# Altium PCB PCB2.PcbDoc (part 2 of 2)
Units mm, origin at the board's own origin, x right, y up, seen from the top; angles counter-clockwise.
Board outline 46.9 x 46.9 mm, 4 copper layers (Top Layer, Internal Plane 1, Signal Layer 2, Bottom Layer), stack 0.778 mm thick; 115 components, 66 nets, 371 pads, 999 vias.
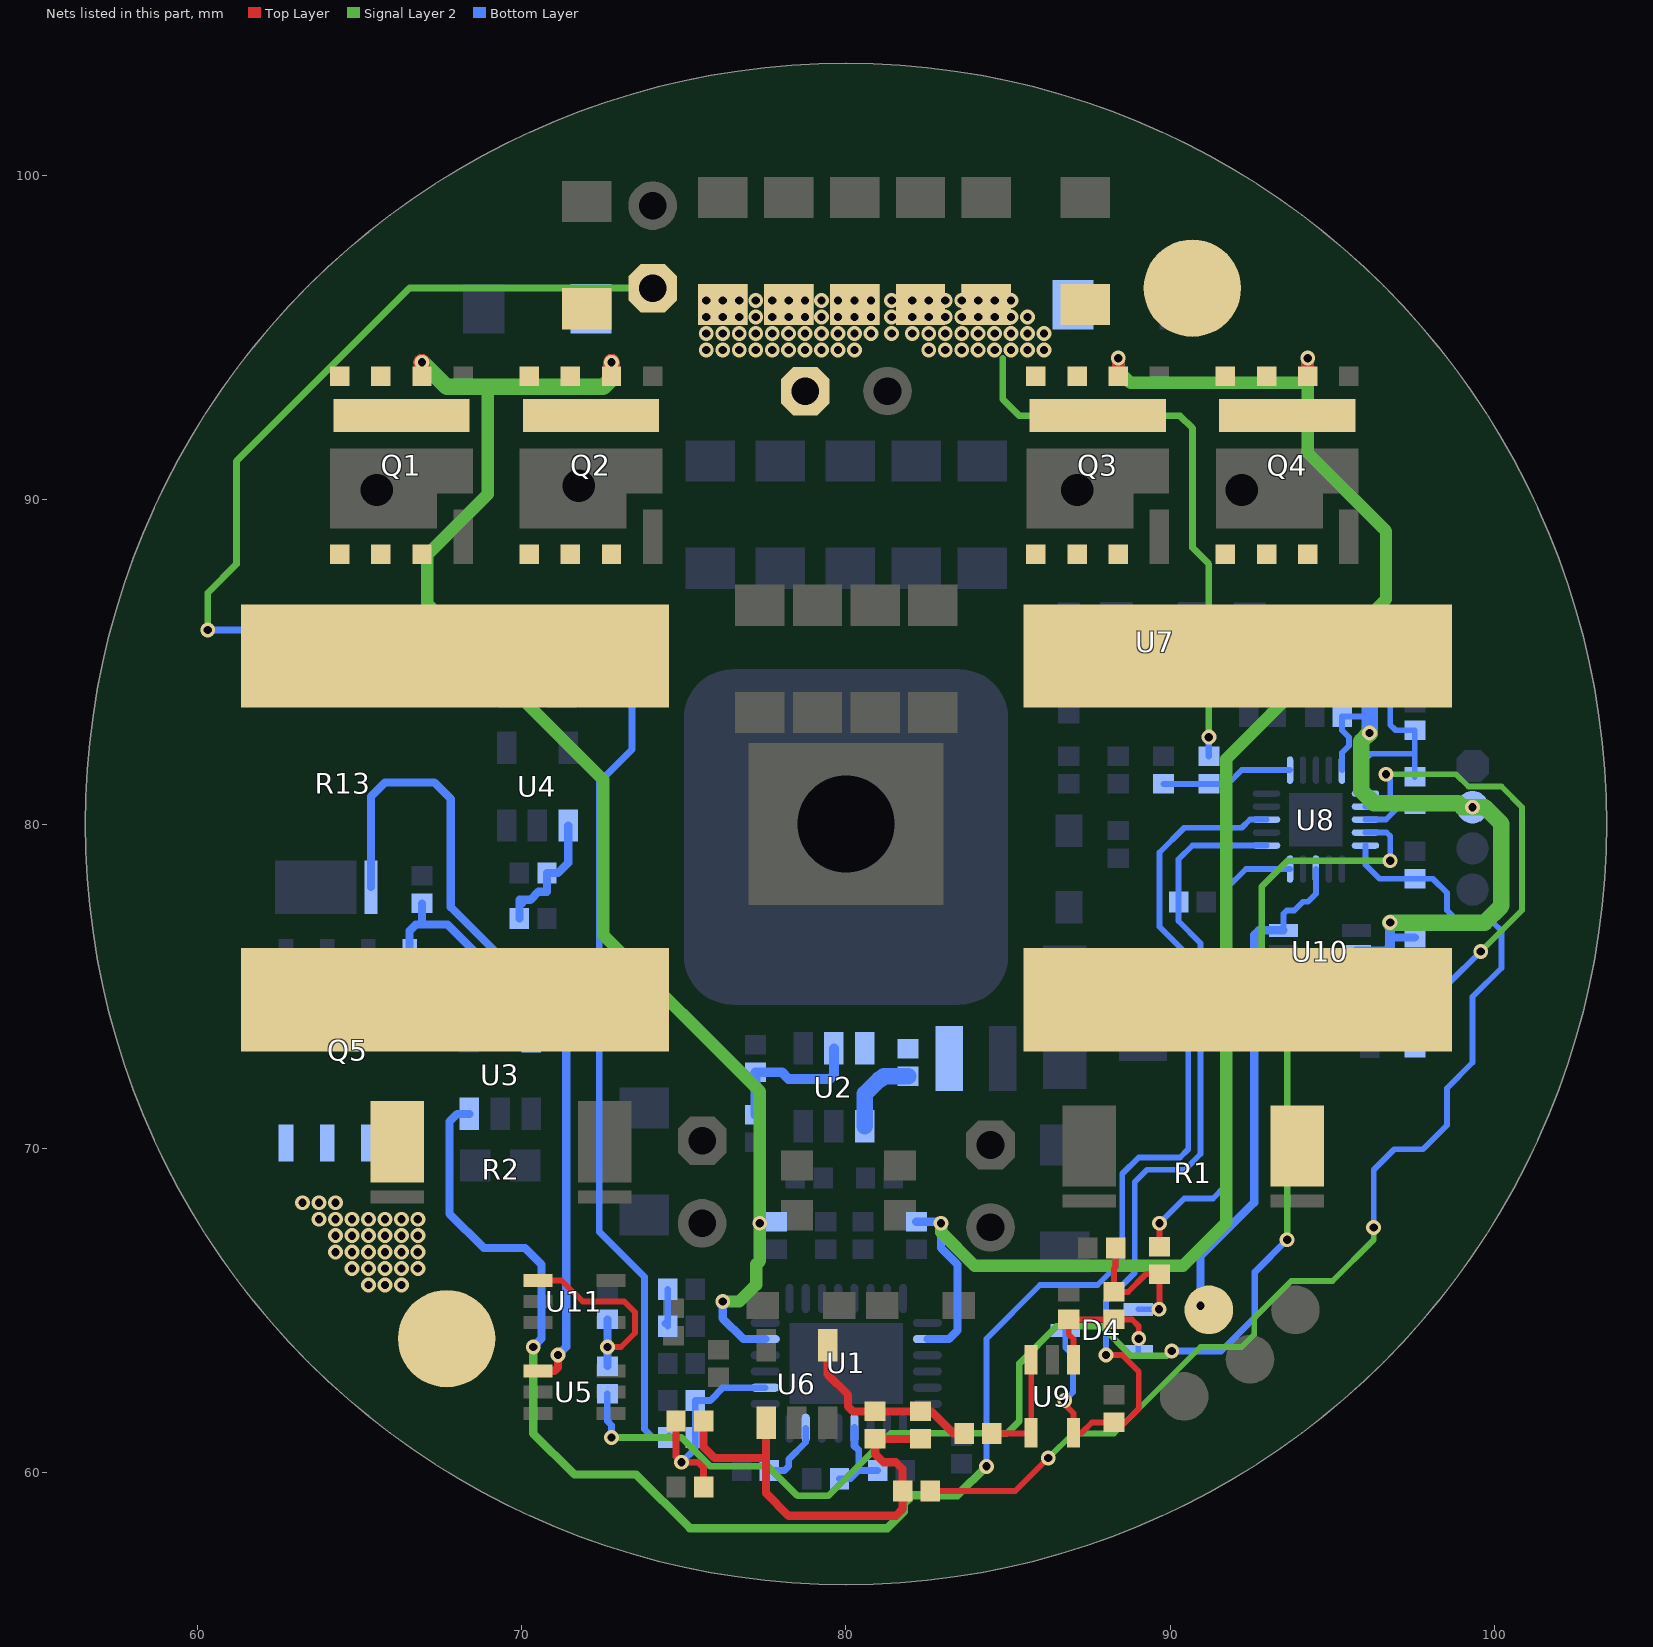
[diagram p4: the nets of this part, all layers, seen from the top]

## Via types
v1: diameter 0.457, hole 0.254, Top Layer to Bottom Layer, tented both sides, 999 vias

## Nets (pads, with @x,y where several pads share a name; then routed paths per layer and width w, separated by ;. In a path a pad name is that pad's centre, name@x,y a point inside that pad or via, vN(x,y) a via of type N, cw(c..) or ccw(c..) an arc to the next point about the centre after c; other vN are vias at no path point) (continued)
LARGEIS_P: R13.3 U5.4 | length 25.4
  Top Layer w0.254: U5.4@70.503,63.134 71.008,63.134 71.12,63.246 v1(71.12,63.627)
  Bottom Layer w0.254: R13.3@65.354,78.054 65.354,80.848 65.786,81.28 67.31,81.28 67.818,80.772 67.818,77.434 71.374,73.878 71.374,63.881 v1(71.12,63.627)
LARGESEL: U3.3 U8.18 | length 55.8
  Signal Layer 2 w0.254: v1(70.358,63.881) 70.358,61.214 71.628,59.944 73.533,59.944 75.184,58.293 81.28,58.293 81.788,58.801 81.788,59.055 82.042,59.309 83.439,59.309 v1(84.328,60.198)
  Bottom Layer w0.178: v1(84.328,60.198) 84.328,64.135 85.979,65.786 87.757,65.786 88.519,66.548 88.519,69.215 89.027,69.723 90.297,69.723 90.551,69.977 90.551,75.946 89.662,76.835 89.662,79.121 90.424,79.883 92.202,79.883 92.456,80.137 U8.18@92.963,80.137
  Bottom Layer w0.254: U3.3@68.392,71.063 68.015,71.063 67.78,70.828 67.78,67.983 68.834,66.929 70.104,66.929 70.612,66.421 70.612,64.135 v1(70.358,63.881)
LED-: pad.6@67.691,64.135 Q5.5 Q5.6 Q5.7 Q5.8
  other v1: 65.278,65.786 65.786,65.786 66.294,65.786 64.77,66.294 65.278,66.294 65.786,66.294 66.294,66.294 66.802,66.294 64.262,66.802 64.77,66.802 65.278,66.802 65.786,66.802 66.294,66.802 66.802,66.802 64.262,67.31 64.77,67.31 65.278,67.31 65.786,67.31 66.294,67.31 66.802,67.31 63.754,67.818 64.262,67.818 64.77,67.818 65.278,67.818 65.786,67.818 66.294,67.818 66.802,67.818 63.246,68.326 63.754,68.326 64.262,68.326
LX1: L1.2 Q3.5 Q3.6 Q3.7 Q4.5 Q4.6 Q4.7
LX2: L2.2 Q1.5 Q1.6 Q1.7 Q2.5 Q2.6 Q2.7
MCU5V: C39.2 C41.2 pad.1 R27.2 U7.5 U8.5 U10.5 | length 25.2
  Signal Layer 2 w0.508: v1(96.139,82.804) 95.885,82.55 95.885,81.026 96.266,80.645 98.87,80.645 98.996,80.518 v1(99.314,80.518) 99.695,80.518 100.203,80.01 100.203,77.476 99.689,76.962 v1(96.774,76.962)
  Bottom Layer w0.178: U8.5@95.288,81.662 95.288,82.199 95.504,82.415 95.504,82.677 95.294,82.887 C41.2@95.294,83.312 96.139,83.312
  Bottom Layer w0.254: 96.774,76.581 96.857,76.498 R27.2@97.536,76.498
  Bottom Layer w0.305: U10.5@95.74,76.073 96.647,76.073 96.774,76.2 96.774,76.581 v1(96.774,76.962)
  Bottom Layer w0.508: U7.5@90.735,84.648 91.379,84.648 91.559,84.828 C39.2@92.456,84.828 95.379,84.828 96.139,84.068 v1(96.139,82.804)
MODE: R10.1 R11.2 U1.4 | length 2.6
  Bottom Layer w0.208: R10.1@79.8,59.817 80.137,59.817 80.391,60.071 ; 80.26,60.837 80.391,60.706 80.391,60.071 ; R11.2@80.982,60.071 80.391,60.071
  Bottom Layer w0.254: 80.26,60.837 U1.4@80.26,61.373
MOSG: Q5.4 R12.1 U3.5 | length 7.2
  Bottom Layer w0.254: Q5.4@66.548,75.885 66.548,76.708 66.739,76.899 66.929,76.899 ; R12.1@66.929,77.553 66.929,76.899 ; U3.5@70.292,73.463 70.292,74.318 67.712,76.899 66.929,76.899
NetC5_1: C5.1 L3.2 U2.6
NetC5_2: C5.2 U2.1 | length 2.6
  Bottom Layer w0.508: U2.1@80.579,70.682 80.579,71.681 81.026,72.128 81.067,72.128 81.158,72.219 C5.2@81.915,72.219
NetC6_2: C6.2 R3.1 U2.5 | length 4.7
  Bottom Layer w0.305: C6.2@77.216,71.037 R3.1@77.216,72.346 78.022,72.346 78.232,72.136 79.502,72.136 79.629,72.263 U2.5@79.629,73.082
NetC31_1: C31.1 R7.2 | length 1.3
  Bottom Layer w0.208: R7.2@74.422,64.599 R7.2@74.505,64.516 C31.1@74.505,65.659
NetC35_2: C35.2 FB1.2 U4.1 | length 4.1
  Bottom Layer w0.254: FB1.2@69.933,77.089 69.933,77.663 ; 70.015,77.552 70.015,77.611 69.963,77.663 70.27,77.663 70.519,77.912 70.783,77.912 C35.2@70.783,78.486 71.12,78.486 71.435,78.801 U4.1@71.435,79.953
NetC37_1: C37.1 R15.2 R16.1 U6.4 | length 6
  Top Layer w0.254: U6.4@79.436,63.811 79.436,63.034 80.063,62.407 80.063,62.05 80.22,61.893 R16.1@80.899,61.893 C37.1@82.296,61.893 82.633,61.893 83.312,61.214 R15.2@83.649,61.214
NetC40_2: C40.2 FB2.2 U7.1 | length 3.8
  Bottom Layer w0.254: FB2.2@86.868,84.245 C40.2@86.868,85.681 87.293,85.681 87.503,85.471 87.503,84.709 87.564,84.648 U7.1@88.335,84.648
NetC44_2: C44.2 D4.1 R24.2 R25.1 | length 4.7
  Top Layer w0.178: C44.2@88.309,66.929 88.309,66.338 88.265,66.294 R25.1@88.265,65.576 88.69,65.576 89.237,66.123 R24.2@89.662,66.123 v1@89.662,65.054
  Bottom Layer w0.178: D4.1@89.009,65.039 v1(89.647,65.039)
NetC45_2: C45.2 D4.2 R25.2 U9.1 | length 4.3
  Top Layer w0.178: U9.1@87.01,63.482 87.01,64.12 86.868,64.262 C45.2@86.868,64.726 R25.2@88.265,64.726 88.817,64.726 89.027,64.516 v1(89.027,64.135)
  Bottom Layer w0.178: D4.2@89.009,63.739 89.009,64.117 v1(89.027,64.135)
NetC56_2: C56.2 R32.1 U11.1 | length 6.5
  Top Layer w0.178: U11.1@70.503,65.928 71.232,65.928 71.882,65.278 73.162,65.278 73.492,64.948 73.492,64.308 73.065,63.881 v1(72.644,63.881)
  Bottom Layer w0.254: R32.1@72.644,63.29 C56.2@72.644,64.726
NetD5_A: D5.A R31.1 | length 2.4
  Bottom Layer w0.178: D5.A@96.139,74.21 96.732,74.21 96.774,74.168 96.774,73.279 96.945,73.108 R31.1@97.536,73.108
NetL1_1: L1.1 R1.1
NetL2_1: L2.1 R2.0
OPOUT: C37.2 R16.2 R17.1 R28.1 U6.1 | length 13.6
  Top Layer w0.254: R17.1@75.609,61.595 75.609,60.789 75.946,60.452 77.536,60.452 ; U6.1@77.536,61.411 77.536,60.452 ; C37.2@82.296,61.043 R16.2@80.899,61.043 80.899,60.579 81.153,60.325 81.534,60.325 81.744,60.115 R28.1@81.744,59.436 81.744,58.884 81.534,58.674 78.232,58.674 77.536,59.37 77.536,60.452
OPVCC: C43.2 D4.3 R26.2 U8.16 U9.5 | length 28.3
  Top Layer w0.178: v1(86.741,62.23) 86.741,62.103 87.01,61.834 U9.5@87.01,61.232 87.267,61.232 87.586,61.551 C43.2@88.265,61.551 88.602,61.551 89.027,61.976 89.027,63.119 88.519,63.627 88.265,63.627
  Bottom Layer w0.178: v1(86.741,62.23) 86.995,62.484 86.995,63.627 86.759,63.863 D4.3@86.759,64.389 ; v1(88.011,63.627) 88.011,65.278 88.9,66.167 88.9,68.961 89.281,69.342 90.45,69.342 90.932,69.824 90.932,76.327 90.253,77.006 R26.2@90.253,77.597 90.253,78.912 90.678,79.337 U8.16@92.963,79.337
OUTFB: R21.1 R23.2 U8.1 | length 4.1
  Bottom Layer w0.178: R23.2@89.789,81.236 91.777,81.236 92.203,81.662 U8.1@93.688,81.662
PHASE1: C10.2 Q3.2 Q4.2 U1.24 | length 52.5
  Top Layer w0.381: Q3.2@88.392,93.809 v1(88.392,94.361) ; Q4.2@94.234,93.809 v1(94.234,94.361)
  Signal Layer 2 w0.381: v1(82.931,67.691) 82.931,67.419 83.966,66.383 90.386,66.383 91.722,67.719 91.722,82.003 96.647,86.928 96.647,89.027 94.234,91.44 94.234,93.599 ; v1(88.392,94.361) 88.392,93.98 88.773,93.599 94.234,93.599 ; v1(94.234,94.361) 94.234,93.599
  Bottom Layer w0.254: C10.2@82.169,67.735 v1@82.887,67.735 ; U1.24@82.51,64.123 83.173,64.123 83.439,64.389 83.439,66.421 82.931,66.929 v1(82.931,67.691)
PHASE2: C9.2 Q1.2 Q2.2 U1.13 | length 43.7
  Top Layer w0.508: Q1.2@66.929,93.809 v1(66.929,94.234) ; Q2.2@72.771,93.809 v1(72.771,94.234)
  Signal Layer 2 w0.381: 68.961,93.472 68.961,90.17 67.096,88.305 67.096,86.781 72.517,81.36 72.517,76.581 77.343,71.755 v1(77.343,67.691) 77.343,66.535 77.232,66.423 77.232,65.802 76.708,65.278 v1(76.2,65.278)
  Signal Layer 2 w0.508: v1(66.929,94.234) 67.691,93.472 68.961,93.472 72.517,93.472 72.771,93.726 v1(72.771,94.234)
  Bottom Layer w0.254: v1(76.2,65.278) 76.2,64.763 76.84,64.123 U1.13@77.51,64.123
PRECHARGEEN: R32.2 U8.9 | length 45.6
  Signal Layer 2 w0.203: v1@72.898,61.087 74.93,61.087 75.819,60.198 77.597,60.198 78.508,59.287 79.451,59.287 81.378,61.214 84.963,61.214 85.344,61.595 85.344,63.373 86.487,64.516 87.884,64.516 88.795,63.605 89.894,63.605 v1(90.043,63.754) ; v1(93.599,67.183) 93.599,75.311 92.815,76.095 92.815,78.071 93.611,78.867 96.52,78.867
  Bottom Layer w0.178: U8.9@96.013,79.737 96.666,79.737 96.774,79.629 v1(96.774,78.867)
  Bottom Layer w0.203: R32.2@72.644,62.44 72.644,61.595 72.771,61.468 v1(72.771,61.087) ; v1(90.043,63.754) 91.567,63.754 92.605,64.792 92.605,66.189 v1(93.599,67.183)
PWM: R24.1 U8.15 | length 14.8
  Top Layer w0.178: R24.1@89.662,66.973 v1(89.662,67.691)
  Bottom Layer w0.178: v1(89.662,67.691) 90.424,68.453 91.313,68.453 91.694,68.834 91.694,77.978 92.329,78.613 93.218,78.613 ; 93.092,78.612 U8.15@93.688,78.612
RLED: pad.4@91.186,65.024 U8.13 U10.3 | length 15.6
  Bottom Layer w0.178: U10.3@93.49,76.723 93.49,77.234 93.59,77.334 93.819,77.334 94.092,77.606 94.243,77.606 94.488,77.851 U8.13@94.488,78.612
  Bottom Layer w0.254: v1(90.932,65.151) 90.932,66.675 92.583,68.326 92.583,76.581 92.725,76.723 U10.3@93.49,76.723
SS: C33.1 U1.7 | length 2
  Bottom Layer w0.208: C33.1@77.641,60.071 78.105,60.071 78.232,60.198 78.232,60.413 78.76,60.941 U1.7@78.76,61.373
SYSHB: R31.2 U8.7 | length 14.5
  Signal Layer 2 w0.178: v1(96.647,81.534) 98.806,81.534 99.187,81.153 100.203,81.153 100.838,80.518 100.838,77.343 v1(99.568,76.073)
  Bottom Layer w0.178: U8.7@96.013,80.537 96.488,80.537 96.774,80.823 v1@96.774,81.407 ; R31.2@97.536,73.958 98.469,73.958 98.552,74.041 98.552,75.057 v1(99.568,76.073)
TEMPSEN: C47.2 R29.1 R30.1 U8.6 | length 9.4
  Bottom Layer w0.178: R30.1@94.607,86.233 94.607,85.606 94.742,85.471 94.869,85.471 94.969,85.371 95.604,85.371 96.774,84.201 96.774,83.058 96.945,82.887 C47.2@97.536,82.887 97.536,82.169 ; U8.6@96.013,80.937 96.013,82.008 96.174,82.169 97.536,82.169 ; R29.1@97.536,81.451 97.536,82.169
TSEN: R29.2 U8.8 | length 1.7
  Bottom Layer w0.178: U8.8@96.013,80.137 96.647,80.137 97.111,80.601 R29.2@97.536,80.601
VFB: R6.1 R8.1 R14.2 R17.2 U1.10 | length 7.1
  Top Layer w0.208: R17.2@74.759,61.595 74.759,60.496 v1(74.93,60.325) 75.438,60.325 75.609,60.154 R14.2@75.609,59.563
  Bottom Layer w0.208: v1(74.93,60.325) 75.355,60.75 R6.1@75.355,61.087 R8.1@75.355,62.23 75.819,62.23 76.212,62.623 U1.10@77.51,62.623
VOP: C46.2 R28.2 U8.10 | length 34.8
  Top Layer w0.178: R28.2@82.594,59.436 85.217,59.436 v1(86.233,60.452)
  Signal Layer 2 w0.178: v1(86.233,60.452) 86.995,61.214 88.265,61.214 90.932,63.881 92.202,63.881 92.583,64.262 92.583,64.77 93.726,65.913 94.996,65.913 96.266,67.183 v1(96.266,67.564)
  Bottom Layer w0.178: U8.10@96.013,79.337 U8.10@96.013,79.337 96.012,78.746 96.443,78.315 C46.2@97.536,78.315 98.088,78.315 98.525,77.878 98.525,77.343 98.906,76.962 99.949,76.962 100.203,76.708 100.203,75.565 99.314,74.676 99.314,72.644 98.525,71.855 98.525,70.712 97.79,69.977 96.901,69.977 96.266,69.342 v1(96.266,67.564)
VOUT: C3.1 C4.1 C16.2 C17.2 C18.2 C19.2 C20.2 C21.2 C22.2 C23.2 C24.2 C50.2 C51.2 C52.2 C53.2 C54.2 pad.5 Q1.3 Q1.4 Q1.9 Q2.3 Q2.4 Q2.9 Q3.3 Q3.4 Q3.9 Q4.3 Q4.4 Q4.9 R6.2 R21.2 | length 77.5
  Signal Layer 2 w0.208: v1(60.325,85.979) 60.325,87.122 61.214,88.011 61.214,91.186 66.548,96.52 C4.1@74.041,96.52 ; 84.836,94.361 84.836,93.091 85.344,92.583 90.297,92.583 90.678,92.202 90.678,88.519 91.186,88.011 v1(91.186,82.677)
  Bottom Layer w0.208: v1(60.325,85.979) 72.517,85.979 73.406,85.09 73.406,82.296 72.39,81.28 72.39,67.437 73.787,66.04 73.787,61.341 74.041,61.087 R6.2@74.505,61.087 R6.2@74.549,61.131 ; R21.2@91.186,82.086 v1(91.186,82.677)
  other v1: 75.692,94.615 76.2,94.615 76.708,94.615 77.216,94.615 77.724,94.615 78.232,94.615 78.74,94.615 79.248,94.615 79.756,94.615 80.264,94.615 82.55,94.615 83.058,94.615 83.566,94.615 84.074,94.615 84.582,94.615 85.09,94.615 85.598,94.615 86.106,94.615 75.692,95.123 76.2,95.123 76.708,95.123 77.216,95.123 77.724,95.123 78.232,95.123 78.74,95.123 79.248,95.123 79.756,95.123 80.264,95.123 80.772,95.123 81.407,95.123 82.042,95.123 82.55,95.123 83.058,95.123 83.566,95.123 84.074,95.123 84.582,95.123 85.09,95.123 85.598,95.123 86.106,95.123 75.692,95.631 76.2,95.631 76.708,95.631 77.216,95.631 77.724,95.631 78.232,95.631 78.74,95.631 79.248,95.631 79.756,95.631 80.264,95.631 80.772,95.631 81.407,95.631 82.042,95.631 82.55,95.631 83.058,95.631 83.566,95.631 84.074,95.631 84.582,95.631 85.09,95.631 85.598,95.631 75.692,96.139 76.2,96.139 76.708,96.139 77.216,96.139 77.724,96.139 78.232,96.139 78.74,96.139 79.248,96.139 79.756,96.139 80.264,96.139 80.772,96.139 81.407,96.139 82.042,96.139 82.55,96.139 83.058,96.139 83.566,96.139 84.074,96.139 84.582,96.139 85.09,96.139
VREF: R15.1 U9.3 U9.4 | length 3.5
  Top Layer w0.178: R15.1@84.499,61.214 85.692,61.214 U9.4@85.71,61.232 U9.3@85.71,63.482
pads on no net: U1.2 U1.3 U1.12 U1.25 U4.2 U7.2 U8.17 U10.4

## Polygon pours and split planes (outlines as drawn)
GND on Bottom Layer "Component Side-No Net 1" (solid, remove dead copper, pour order 154): 65.754,77.053 65.833,76.974 68.961,76.974 68.961,76.581 71.12,74.422 70.993,74.295 70.993,72.263 66.929,72.263
GND on Bottom Layer "Component Side-No Net 1" (solid, remove dead copper, pour order 117): 82.76,60.821 84.824,60.821 85.09,61.087 85.852,61.849 85.852,67.183 85.09,67.183 84.836,66.929 81.915,66.929 81.915,64.516 83.058,63.373 83.058,62.23 82.53,62.23 81.881,61.581
GND on Bottom Layer "Component Side-No Net 1" (solid, remove dead copper, pour order 115): 68.382,82.677 68.551,82.846 70.935,82.846 70.935,85.529 70.612,85.852 70.231,85.471 67.818,85.471
GND on Bottom Layer "Component Side-No Net 1" (solid, remove dead copper, pour order 112): 57.702,86.106 65.128,86.106 65.754,85.48 65.687,85.413 65.687,82.677 58.547,82.677 58.42,82.55
GND on Bottom Layer "Component Side-No Net 1" (solid, remove dead copper, pour order 109): 86.141,87.797 86.056,87.712 86.056,85.977 91.384,85.977 91.712,85.649 92.398,84.963 99.187,84.963 99.187,87.884 99.822,88.519 97.028,91.313 85.344,91.313
GND on Bottom Layer "Component Side-No Net 1" (solid, remove dead copper, pour order 103): 86.487,53.213 85.979,53.721 85.979,89.408 109.855,89.408 109.982,89.281 110.236,89.027 110.236,53.086
GND on Bottom Layer "Component Side-No Net 1" (solid, remove dead copper, pour order 100): 52.959,82.423 57.404,86.868 84.582,86.868 101.854,86.868 103.886,88.9 100.838,91.948 100.838,103.505 62.484,103.505 59.309,106.68
GND on Bottom Layer "Component Side-No Net 1" (solid, remove dead copper, pour order 91): 56.261,78.74 58.42,80.899 73.787,80.899 73.787,68.707 74.803,67.691 75.819,66.675 75.819,66.548 74.295,66.548 73.787,66.04 73.477,65.73 73.477,64.226 73.477,56.459 73.406,56.388 73.152,56.134 55.499,56.134
GND on Bottom Layer "Component Side-No Net 1" (solid, remove dead copper, pour order 88): 70.358,66.294 70.485,66.167 77.414,66.167 98.171,66.167 98.933,65.405 100.076,64.262 100.076,54.483 63.119,54.483 59.436,50.8 56.388,53.848 56.388,69.342 69.723,69.342 69.977,69.088
GND on Bottom Layer "Component Side-No Net 1" (solid, remove dead copper, pour order 172): 92.202,82.296 93.218,81.28 93.218,68.58 101.6,68.58 101.727,68.453 104.648,71.374 104.648,83.058
GND on Bottom Layer "Component Side-No Net 1" (solid, remove dead copper, pour order 171): 54.864,89.281 56.134,88.011 75.692,88.011 75.692,76.2 77.343,74.549 77.775,74.117 77.775,71.987 77.775,71.044 77.343,70.612 77.089,70.866 53.213,70.866
12V on Bottom Layer "Component Side-No Net 1" (solid, remove dead copper, pour order 169): 72.644,71.247 72.644,72.39 72.771,72.517 75.311,72.517 76.454,72.517 76.454,71.247 76.454,69.469 76.15,69.165 76.1,69.215 72.644,69.215
12V on Bottom Layer "Component Side-No Net 1" (solid, remove dead copper, pour order 167): 82.042,70.993 82.042,68.961 87.791,68.961 88.045,69.214 88.011,69.248 88.011,71.247 88.011,71.501 87.884,71.628 87.757,71.501 83.312,71.501 82.042,71.501
12V on Bottom Layer "Component Side-No Net 1" (solid, remove dead copper, pour order 166): 72.39,72.517 72.39,68.961 76.2,68.961 76.454,69.215 76.454,72.517
GND on Bottom Layer "Component Side-No Net 1" (solid, remove dead copper, pour order 165): 83.693,68.58 82.804,68.58 82.804,65.659 83.185,65.278 83.439,65.024 84.582,65.024 88.011,65.024 88.265,65.278 88.138,65.405 88.138,68.961 83.693,68.961
6V0 on Bottom Layer "Component Side-No Net 1" (solid, remove dead copper, pour order 110): 84.213,73.827 84.328,73.711 84.328,71.424 85.675,71.424 87.757,69.342 87.985,69.57 90.678,69.57 90.678,73.787 90.551,73.914
GND on Bottom Layer "Component Side-No Net 1" (solid, remove dead copper, pour order 104): 85.323,68.884 85.725,68.482 85.725,66.167 91.186,66.167 92.075,67.056 92.075,73.279 92.075,76.173 91.23,77.018 91.159,77.089 85.979,77.089 85.217,77.089 85.09,76.962
GND on Bottom Layer "Component Side-No Net 1" (solid, remove dead copper, pour order 159): 55.372,86.106 62.56,86.106 63.246,85.42 63.246,82.423 59.817,82.423 57.15,79.756 56.515,80.391 54.737,80.391
GND on Bottom Layer "Component Side-No Net 1" (solid, remove dead copper, pour order 157): 73.533,66.548 76.454,66.548 76.454,66.421 76.835,66.04 76.708,65.913 76.708,65.024 76.835,65.024 77.216,64.643 77.851,64.643 77.978,64.643 78.359,65.024 77.978,65.405 77.978,68.961 73.533,68.961
GND on Bottom Layer "Component Side-No Net 1" (solid, remove dead copper, pour order 152): 83.566,68.707 83.566,67.021 83.739,66.848 83.912,66.675 85.344,66.675 85.344,68.834 85.471,68.961
GND on Bottom Layer "Component Side-No Net 1" (solid, remove dead copper, pour order 151): 86.141,87.249 95.25,87.249 95.504,86.995 95.504,85.725 95.631,85.598 95.758,85.471 98.425,85.471 102.489,85.471 103.632,86.614 103.378,86.868 103.378,90.424 86.141,90.297
GND on Bottom Layer "Component Side-No Net 1" (solid, remove dead copper, pour order 149): 83.439,68.453 87.63,68.453 88.011,68.072 88.011,66.548 88.011,66.421 87.884,66.294 86.36,66.294 83.82,66.294 83.439,66.675 83.439,67.056
GND on Bottom Layer "Component Side-No Net 1" (solid, remove dead copper, pour order 148): 85.598,74.676 88.138,74.676 88.265,74.549 88.392,74.422 89.535,74.422 89.916,74.422 90.043,74.549 90.043,75.565 90.043,75.946 89.916,76.073 89.535,76.454 89.027,76.454 88.011,76.454 87.63,76.835 87.63,78.105 85.709,78.105
LED- on Bottom Layer "Component Side-No Net 1" (solid, remove dead copper, pour order 146): 64.516,66.167 65.151,65.532 66.421,65.532 67.056,66.167 67.31,66.421 67.31,69.977 67.31,74.499 67.233,74.422 61.82,74.422 61.82,71.657 61.849,71.628 61.849,70.231 61.849,69.723 62.23,69.342 62.865,68.707 62.865,68.326 62.865,68.199 63.246,67.818 64.008,67.056 64.008,66.675
HPATH on Bottom Layer "Component Side-No Net 1" (solid, remove dead copper, pour order 141): 61.976,78.867 61.976,74.422 65.151,74.422 65.532,74.422 65.532,74.676 65.532,76.581 65.278,76.835 65.151,76.962 64.897,76.962 64.897,78.867
12V on Bottom Layer "Component Side-No Net 1" (solid, remove dead copper, pour order 132): 74.422,87.884 85.852,87.884 85.852,82.55 85.852,76.962 85.725,77.216 85.725,74.295 85.344,73.914 85.09,73.66 77.724,73.66 74.803,73.66 74.422,74.041
VOUT on Bottom Layer "Component Side-No Net 1" (solid, remove dead copper, pour order 129): 71.247,97.536 84.836,97.536 87.376,97.536 87.757,97.155 87.884,97.028 87.884,94.869 87.376,94.361 85.344,94.361 80.645,94.361 80.264,93.98 80.137,93.853 80.137,92.837 80.137,92.456 79.883,92.202 78.359,92.202 77.597,92.202 77.343,92.456 77.343,92.71 77.343,93.472 77.343,93.853 76.962,94.234 75.565,94.234 75.184,94.234 74.803,94.615 74.676,94.742 73.533,94.742 71.501,94.742 71.12,95.123 71.12,97.409
6V0 on Bottom Layer "Component Side-No Net 1" (solid, remove dead copper, pour order 105): 87.63,73.914 89.789,73.914 90.043,73.66 90.043,71.374 90.043,70.485 89.154,70.485 88.773,70.485 88.773,71.374 88.773,71.501 88.519,71.755 88.392,71.882 86.995,71.882 86.995,73.66 86.741,73.914
GND on Bottom Layer "Component Side-No Net 1" (solid, remove dead copper, pour order 102): 85.598,74.676 87.63,74.676 87.63,78.105 85.598,78.105
6V0 on Bottom Layer "Component Side-No Net 1" (solid, remove dead copper, pour order 98): 84.201,73.914 87.63,73.914 87.63,71.628 84.328,71.628 84.201,71.755
NetC5_1 on Bottom Layer "Component Side-No Net 1" (solid, remove dead copper, pour order 96): 80.137,73.787 83.693,73.787 83.693,71.755 82.804,71.755 82.296,71.755 82.296,72.517 81.661,72.517 80.137,72.517
12V on Bottom Layer "Component Side-No Net 1" (solid, remove dead copper, pour order 162): 74.422,87.556 74.422,88.519 85.852,88.519 85.852,86.487 85.598,86.233 84.709,85.344 84.709,83.395 80.347,83.395 80.01,83.058 79.375,83.693 74.422,83.693
GND on Bottom Layer "Component Side-No Net 1" (solid, remove dead copper, pour order 138): 70.358,84.709 70.358,81.788 70.104,81.534 69.977,81.407 69.977,80.391 69.977,79.248 70.231,78.994 70.358,78.867 70.358,78.486 70.358,78.105 70.231,77.978 70.104,78.105 69.215,78.105 69.088,78.105 68.834,78.359 68.707,78.486 68.707,84.709
GND on Bottom Layer "Component Side-No Net 1" (solid, remove dead copper, pour order 89): 67.945,74.041 68.072,73.914 68.072,71.755 68.961,71.755 69.045,71.671 69.045,70.566 69.599,70.566 69.723,70.69 69.723,71.755 70.993,71.755 70.993,72.644 70.612,72.644 69.215,72.644 68.961,72.644 68.834,72.771 68.834,74.041
GND on Bottom Layer "Component Side-No Net 1" (solid, remove dead copper, pour order 92): 67.945,70.104 68.821,70.104 69.133,70.417 69.215,70.498 69.215,71.882 69.673,71.882 69.792,71.763 69.723,71.694 69.723,68.834 67.945,68.834 67.818,68.961
GND on Bottom Layer "Component Side-No Net 1" (solid, remove dead copper, pour order 95): 74.041,66.548 73.993,66.596 68.834,66.596 68.834,70.866 72.644,74.676 81.661,74.676 84.99,74.676 85.548,74.118 84.963,73.533 84.963,66.421
GND on Bottom Layer "Component Side-No Net 1" (solid, remove dead copper, pour order 101): 76.237,60.327 76.96,60.327 76.962,60.325 77.089,60.198 77.089,59.182 76.2,59.182
GND on Signal Layer 2 "Component Side-No Net 1" (solid, remove dead copper, pour order 128): 79.502,90.678 79.756,90.932 79.756,94.615 83.566,94.615 83.439,94.488 83.439,89.027
GND on Signal Layer 2 "Component Side-No Net 1" (solid, remove dead copper, pour order 126): 82.437,68.834 85.852,68.834 86.233,69.215 86.233,66.548 82.621,66.548 82.24,66.167
GND on Signal Layer 2 "Component Side-No Net 1" (solid, remove dead copper, pour order 123): 73.372,68.757 76.103,68.757 76.307,68.961 77.089,68.179 77.089,66.675 74.041,66.675 73.902,66.814 73.635,67.081 73.018,67.081
GND on Signal Layer 2 "Component Side-No Net 1" (solid, remove dead copper, pour order 120): 68.326,102.616 69.469,101.473 76.454,101.473 76.454,98.171 77.089,97.536 69.342,97.536
GND on Signal Layer 2 "Component Side-No Net 1" (solid, remove dead copper, pour order 106): 54.102,107.188 104.267,107.188 104.394,107.061 112.395,99.06 112.395,53.721 57.531,53.721 56.388,54.864
12V on Signal Layer 2 "Component Side-No Net 1" (solid, remove dead copper, pour order 170): 72.771,71.14 72.771,72.517 75.057,72.517 75.438,72.517 76.454,71.501 76.307,71.354 76.307,68.961 72.771,68.961
12V on Signal Layer 2 "Component Side-No Net 1" (solid, remove dead copper, pour order 168): 72.771,71.501 75.946,71.501 76.327,71.12 76.454,70.993 76.454,69.215 76.454,69.088 76.327,68.961 76.073,68.961 72.898,68.961 72.771,68.961
12V on Signal Layer 2 "Component Side-No Net 1" (solid, remove dead copper, pour order 135): 76.547,75.531 76.454,75.623 76.454,85.598 83.566,85.598 83.566,75.438
LED- on Signal Layer 2 "Component Side-No Net 1" (solid, remove dead copper, pour order 161): 62.23,69.469 62.865,68.834 67.437,68.834 67.437,65.405 67.691,65.151 66.802,64.262 65.532,64.262 63.164,64.262 62.646,64.781
12V on Signal Layer 2 "Component Side-No Net 1" (solid, remove dead copper, pour order 160): 80.772,65.786 90.043,65.786 91.821,67.564 91.44,67.945 91.44,74.803 91.44,80.391 86.868,84.963 86.36,85.471 74.676,85.471 74.676,66.765 75.685,65.756
VOUT on Signal Layer 2 "Component Side-No Net 1" (solid, remove dead copper, pour order 137): 73.025,97.282 73.025,95.885 73.406,95.504 73.533,95.377 74.803,95.377 75.057,95.123 75.184,94.996 75.184,94.234 75.184,92.837 75.438,92.583 75.565,92.456 78.994,92.456 79.629,92.456 80.137,92.964 80.264,93.091 80.264,94.107 80.391,94.234 85.217,94.234 86.36,94.234 86.487,94.361 86.487,95.377 86.487,97.409 86.36,97.536 73.279,97.536
6V0 on Signal Layer 2 "Component Side-No Net 1" (solid, remove dead copper, pour order 107): 88.646,71.628 90.043,71.628 90.043,70.485 88.773,70.485 87.249,70.485 86.741,70.993 86.487,71.247 84.582,71.247 82.296,71.247 82.042,70.993 81.661,70.612 81.661,68.834 81.661,68.326 81.28,67.945 81.28,66.675 81.153,66.548 80.645,66.548 80.645,66.675 80.645,69.469 80.645,71.374 81.28,72.009 81.661,72.39 87.884,72.39
LX2 on Top Layer "Component Side-No Net 1" (solid, remove dead copper, pour order 90): 73.54,88.432 73.54,88.79 73.535,88.795 61.757,88.795 61.389,88.427 61.403,88.412 61.403,87.36 61.403,87.079 61.617,86.865 61.922,87.171 73.56,87.171
GND on Top Layer "Component Side-No Net 1" (solid, remove dead copper, pour order 88): 68.879,89.659 68.879,88.956 73.543,88.956 73.55,88.963 73.664,89.077 73.664,90.575 73.664,91.335 73.7,91.37 73.416,91.086 69.071,91.086
GND on Top Layer "Component Side-No Net 1" (solid, remove dead copper, pour order 150): 98.425,76.835 94.996,73.406 94.996,66.04 94.996,62.992 98.171,59.817 98.298,59.69 108.966,59.69 108.966,77.343 109.474,77.851
GND on Top Layer "Component Side-No Net 1" (solid, remove dead copper, pour order 147): 62.992,66.167 61.976,71.12 60.833,72.263 60.325,71.755 57.658,71.755 57.658,66.802
GND on Top Layer "Component Side-No Net 1" (solid, remove dead copper, pour order 144): 73.279,68.707 73.406,68.58 73.406,66.548 74.001,66.548 74.676,65.873 74.676,65.362 74.76,65.278 77.851,65.278 77.851,65.396 77.687,65.56 77.786,65.659 79.375,65.659 84.154,65.659 85.979,67.484 85.979,68.072 86.24,68.333 86.246,68.326 94.615,68.326 100.457,68.326 101.981,66.802 102.489,66.294 102.489,58.166 102.489,56.261 98.933,52.705 98.806,52.578 66.548,52.578 58.801,52.578 57.785,53.594 54.356,57.023 54.356,68.707
NetL2_1 on Top Layer "Component Side-No Net 1" (solid, remove dead copper, pour order 142): 60.729,74.015 60.729,69.736 61.722,68.961 62.548,68.961 66.675,68.961 66.675,75.184 66.421,75.438
GND on Top Layer "Component Side-No Net 1" (solid, remove dead copper, pour order 139): 86.36,78.105 87.376,78.105 87.376,76.518 87.289,76.431 86.677,75.819 86.36,75.819
GND on Top Layer "Component Side-No Net 1" (solid, remove dead copper, pour order 136): 99.187,76.581 98.298,76.581 98.298,83.693 98.425,83.82 98.552,83.693 100.584,83.693 100.584,76.454 100.203,76.073
12V on Top Layer "Component Side-No Net 1" (solid, remove dead copper, pour order 131): 83.439,68.834 88.519,68.834 88.646,68.961 88.646,71.501 88.646,71.789 88.028,72.407 87.63,72.009 85.344,72.009
NetL2_1 on Top Layer "Component Side-No Net 1" (solid, remove dead copper, pour order 97): 65.147,68.961 61.341,68.961 61.341,74.168 61.468,74.041 66.294,74.041 66.294,68.961
GND on Top Layer "Component Side-No Net 1" (solid, remove dead copper, pour order 94): 56.261,72.898 60.325,72.898 61.087,72.136 61.087,64.389 58.928,64.389 58.801,64.262
12V on Top Layer "Component Side-No Net 1" (solid, remove dead copper, pour order 130): 75.057,83.693 75.057,85.598 82.169,85.598 84.836,85.598 84.963,85.471 84.963,82.804 84.963,80.645 84.836,80.518 84.582,80.264 75.057,80.264
GND on Top Layer "Component Side-No Net 1" (solid, remove dead copper, pour order 127): 68.834,81.661 69.85,81.661 69.85,80.645 68.834,80.645
GND on Top Layer "Component Side-No Net 1" (solid, remove dead copper, pour order 122): 63.119,79.502 63.754,79.502 64.135,79.883 64.135,81.915 64.135,83.058 62.611,83.058 62.611,79.502 62.865,79.248
LED- on Top Layer "Component Side-No Net 1" (solid, remove dead copper, pour order 99): 68.453,67.564 67.945,68.072 65.532,68.072 65.258,68.072 64.623,68.707 63.246,68.707 62.992,68.707 62.865,68.58 63.119,68.326 63.119,67.31 63.119,66.929 63.246,66.802 64.008,66.04 64.643,66.04 66.548,66.04 67.31,65.278
GND on Top Layer "Component Side-No Net 1" (solid, remove dead copper, pour order 116): 73.787,66.548 73.787,69.215 74.041,69.469 77.216,69.469 77.216,65.659 76.962,65.405 76.835,65.532 73.787,65.532
GND on Top Layer "Component Side-No Net 1" (solid, remove dead copper, pour order 158): 74.168,68.63 77.166,68.63 77.166,67.013 77.36,66.819 77.25,66.929 73.787,66.929
GND on Top Layer "Component Side-No Net 1" (solid, remove dead copper, pour order 156): 94.234,85.471 95.631,85.471 96.393,85.471 97.282,85.471 99.187,87.376 98.933,87.122 98.933,75.184 105.537,75.184 105.791,75.438 106.045,75.692 106.045,94.234 106.045,97.028 104.14,98.933 103.886,99.187 95.25,99.187 93.472,99.187 93.218,99.441
GND on Top Layer "Component Side-No Net 1" (solid, remove dead copper, pour order 155): 74.168,68.707 77.089,68.707 77.343,68.453 77.652,68.144 77.652,67.382 77.652,66.602 77.684,66.571 77.026,65.913 75.565,65.913 75.136,65.913 74.168,66.881
GND on Top Layer "Component Side-No Net 1" (solid, remove dead copper, pour order 153): 82.55,68.58 82.55,66.294 82.677,66.167 82.931,65.913 85.852,65.913 85.852,68.58 86.106,68.834 85.979,68.707
GND on Top Layer "Component Side-No Net 1" (solid, remove dead copper, pour order 145): 60.729,83.018 60.769,83.058 62.611,83.058 62.611,79.502 62.484,79.375 61.341,79.375 61.087,79.375 60.579,78.867 60.325,79.121 58.801,79.121 58.801,83.058 58.42,83.439
GND on Top Layer "Component Side-No Net 1" (solid, remove dead copper, pour order 143): 60.729,67.232 60.729,72.841 60.729,85.812 54.777,85.812 54.61,85.979 53.467,84.836 53.467,68.326 58.42,68.326 58.674,68.072
LED- on Top Layer "Component Side-No Net 1" (solid, remove dead copper, pour order 140): 62.23,68.707 64.643,68.707 64.897,68.453 65.024,68.326 65.024,67.564 68.453,67.564 68.707,67.31 69.342,66.675 69.342,66.167 69.342,63.373 68.326,62.357 67.31,62.357 67.183,62.357 66.167,63.373 62.23,67.31 62.23,67.564
GND on Top Layer "Component Side-No Net 1" (solid, remove dead copper, pour order 134): 61.451,88.79 67.581,88.79 67.691,88.9 67.691,90.805 61.214,90.805 60.706,91.313 59.563,90.17 59.563,88.9 59.563,87.884 59.309,87.63
GND on Top Layer "Component Side-No Net 1" (solid, remove dead copper, pour order 133): 54.737,84.582 55.372,85.217 61.468,85.217 61.468,89.027 61.341,89.154 63.881,91.694 65.913,91.694 68.834,91.694 71.628,94.488 91.44,94.488 91.44,93.98 93.218,92.202 93.218,89.281 93.472,89.281 93.726,89.027 99.822,89.027 100.076,89.027 101.854,90.805 98.425,94.234 98.425,98.806 96.266,98.806 91.186,103.886 90.678,104.394 58.293,104.394
VOUT on Top Layer "Component Side-No Net 1" (solid, remove dead copper, pour order 125): 64.008,93.726 64.008,94.869 64.516,95.377 68.072,98.171 74.549,98.171 91.313,98.171 93.345,96.139 93.472,96.012 93.472,93.599 93.599,93.472 95.377,93.472 95.758,93.472 96.012,93.218 96.012,91.567 95.885,91.567 64.135,91.567 64.008,91.694
GND on Top Layer "Component Side-No Net 1" (solid, remove dead copper, pour order 124): 80.518,91.694 80.518,93.98 80.518,94.107 80.645,94.234 81.534,94.234 82.042,94.234 82.169,94.107 82.296,93.98 82.296,91.313 82.296,90.17 82.042,89.916 81.915,89.789 80.645,89.789
GND on Top Layer "Component Side-No Net 1" (solid, remove dead copper, pour order 121): 75.057,85.979 75.057,89.027 75.057,89.154 74.549,89.662 74.295,89.408 72.771,89.408 69.342,89.154 69.342,91.694 88.646,91.694 90.043,91.694 90.17,91.567 89.162,90.559 89.162,89.027 85.217,89.027 84.836,88.646 84.836,85.979
LX1 on Top Layer "Component Side-No Net 1" (solid, remove dead copper, pour order 119): 85.217,89.027 94.742,89.027 94.869,88.9 94.869,87.503 94.996,87.376 97.917,87.376 99.187,87.376 99.187,83.693 98.933,83.439 97.536,83.439 85.471,83.439 85.217,83.693
GND on Top Layer "Component Side-No Net 1" (solid, remove dead copper, pour order 118): 85.217,91.567 95.885,91.567 95.885,90.17 94.742,90.17 94.742,89.027 91.948,89.027 91.186,89.027 85.217,89.027
GND on Top Layer "Component Side-No Net 1" (solid, remove dead copper, pour order 114): 63.881,91.567 74.422,91.567 74.422,89.408 74.168,89.154 64.135,89.154 61.341,89.154 61.214,89.281 61.214,91.44 61.214,91.567
LX2 on Top Layer "Component Side-No Net 1" (solid, remove dead copper, pour order 113): 63.881,88.646 67.564,88.646 74.295,88.646 74.676,88.265 74.676,86.741 74.676,83.693 74.549,83.566 72.644,83.566 61.341,83.566 61.341,86.741 61.341,88.392 61.595,88.646
NetL1_1 on Top Layer "Component Side-No Net 1" (solid, remove dead copper, pour order 111): 84.963,76.327 85.09,76.454 98.679,76.454 98.933,76.2 98.933,72.898 98.933,70.866 96.901,68.834 94.488,68.834 90.932,68.834 90.805,68.961 90.551,69.215 90.551,70.231 90.551,71.501 90.17,71.882 88.265,71.882 84.963,71.882 84.836,72.009
12V on Top Layer "Component Side-No Net 1" (solid, remove dead copper, pour order 108): 88.265,68.834 71.755,68.834 71.755,71.247 71.755,72.39 72.009,72.644 73.533,72.644 74.676,72.644 74.93,72.898 75.057,73.025 75.057,75.057 75.057,83.693 75.565,84.201 83.566,84.201 84.201,84.201 84.709,83.693 84.963,83.439 84.963,78.867 84.963,72.898 85.217,72.644 85.598,72.263 87.63,72.263 87.884,72.263 88.265,71.882
GND on Top Layer "Component Side-No Net 1" (solid, remove dead copper, pour order 93): 74.803,68.961 75.057,68.707 84.963,68.707 84.963,66.675 84.582,66.294 84.201,65.913 78.74,65.913 74.803,65.913 74.295,66.421 73.914,66.802 73.914,69.215
GND on Top Layer "Component Side-No Net 1" (solid, remove dead copper, pour order 163): 60.51,83.058 63.119,83.058 63.119,79.502 62.992,79.375 62.865,79.248 62.103,79.248 60.96,79.248 60.579,78.867 59.69,78.867 59.69,82.845 59.247,83.288
6V0 on Top Layer "Component Side-No Net 1" (solid, remove dead copper, pour order 164): 88.646,71.501 90.043,71.501 90.043,70.485 88.646,70.485
NetL2_1 on Top Layer "Component Side-No Net 1" (solid, remove dead copper, pour order 90): 60.833,76.581 60.96,76.454 75.057,76.454 75.057,73.025 74.676,72.644 72.009,72.644 71.755,72.39 71.755,68.904 71.698,68.961 64.262,68.961 60.579,68.961 60.452,69.088
GND on Top Layer "Component Side-No Net 1" (solid, remove dead copper, pour order 87): 67.945,72.644 68.199,72.39 70.485,72.39 70.485,71.755 70.104,71.374 67.564,71.374
VOUT on Internal Plane 1 (split plane): 86.485,95.45 86.485,94.415 86.052,93.982 82.096,93.982 81.626,94.453 81.584,94.481 81.534,94.49 80.899,94.49 80.849,94.481 80.807,94.453 79.791,93.437 79.763,93.395 79.754,93.345 79.754,92.51 79.702,92.458 78.159,92.458 77.599,93.018 77.599,93.853 77.59,93.903 77.562,93.945 77.308,94.199 77.266,94.227 77.216,94.236 75.492,94.236 75.313,94.415 75.313,94.615 75.304,94.665 75.276,94.707 74.641,95.342 74.599,95.37 74.549,95.379 73.333,95.379 73.027,95.685 73.027,97.355 73.206,97.534 84.401,97.534
12V on Internal Plane 1 (split plane): 84.072,84.02 84.072,75.057 84.072,74.041 84.081,73.991 84.109,73.949 84.617,73.441 84.659,73.413 84.709,73.404 87.703,73.404 88.136,72.971 88.136,70.993 88.136,70.739 88.136,69.269 87.957,69.09 74.93,69.09 74.88,69.081 74.838,69.053 74.368,68.582 72.698,68.582 72.265,69.015 72.265,73.098 73.079,73.912 75.692,73.912 75.742,73.921 75.784,73.949 75.812,73.991 75.821,74.041 75.821,84.147 76.419,84.744 76.447,84.786 76.456,84.834 83.258,84.834
GND on Internal Plane 1 (split plane): 225 vertices, not listed, extent 57.058,57.058 102.942,102.942

## Keep-outs
Keep-Out Layer:
  circle w0.254: c80,80 r23.45

## Other copper
Signal Layer 2:
  text "35" at 76.327,62.484 h1.4
Internal Plane 1 (plane layer: these items are gaps in the copper):
  lines w0.254: 84.836,68.961 88.011,68.961 88.265,69.215 88.265,70.993 ; 85.09,68.961 74.93,68.961 74.422,68.453 72.644,68.453 72.136,68.961 72.136,73.152 73.025,74.041 75.692,74.041 75.692,84.201 76.327,84.836 76.327,84.963 83.312,84.963 84.201,84.074 84.201,75.057 84.201,74.041 84.709,73.533 87.757,73.533 88.265,73.025 88.265,70.739 ; 72.898,95.631 73.279,95.25 74.549,95.25 75.184,94.615 75.184,94.361 75.438,94.107 77.216,94.107 77.47,93.853 77.47,92.964 78.105,92.329 79.756,92.329 79.883,92.456 79.883,93.345 80.899,94.361 81.534,94.361 82.042,93.853 86.106,93.853 86.614,94.361 86.614,95.504 84.455,97.663 73.152,97.663 72.898,97.409 72.898,95.631

## Silkscreen, mask and mechanical layers (free items; w line width, h text height)
Top Overlay:
  circle w0.254: c80,80 r22
  rectangle: 76.986,62.438 77.343,63.038
  rectangle: 96.393,93.472 96.774,93.853
  rectangle: 90.17,94.361 90.551,94.742
  rectangle: 74.93,93.726 75.311,94.107
  rectangle: 68.707,94.361 69.088,94.742
  rectangle: 78.105,70.739 81.915,75.311
  lines w0.254: 63.565,69.469 63.565,65.961 69.85,65.961 ; 73.533,65.913 75.565,65.913 ; 75.438,94.869 86.106,94.869 86.106,100.838 75.438,100.838 ; 86.36,59.563 86.741,59.563 87.503,60.325 88.773,60.325 89.662,61.214 ; 89.281,61.214 89.662,61.214 ; 89.662,60.706 89.662,61.214 ; 90.551,65.834 96.455,65.834 96.455,69.088
  text "L+" at 93.218,95.123 h1.27 r90
  text "XAL1580-182" at 61.976,79.883 h2
  text "XAL1580-182" at 86.487,79.629 h2
  text "JLCJLCJLCJLC" at 61.341,77.089 h2
  text "抄板全家死光" at 86.487,77.089 h2
  text "P1" at 98.044,72.009 h2 r270
  text "P2" at 60.452,70.612 h2
  text "R001" at 67.945,69.342 h1.52
  text "R001" at 89.408,69.342 h1.52
  text "R" at 90.678,66.167 h1.6
  text "Gr" at 91.821,66.167 h1.6
  text "K" at 94.107,66.167 h1.6
  text "L-" at 65.278,64.643 h1.27
  text "G" at 89.154,63.119 h1.6
  text "DFEx" at 80.518,62.865 h2
  text "Key" at 83.439,59.309 h1.8
  text "FBM3" at 76.454,58.801 h2
Bottom Overlay:
  drawing of 26 lines, arcs and shapes, not listed
  text "+" at 73.406,94.615 h1.8 r270
  text "HyperBoost" at 94.488,93.218 h2
  text "High Freq Strobe" at 74.422,92.964 h2
  text "+" at 76.708,92.964 h1.8 r270
  text "VBAT(9-12.6V)" at 71.882,86.487 h1.6
  text "RT" at 99.187,85.725 h1.52
  text "G" at 98.806,82.677 h1.52 r270
  text "R001" at 63.246,79.883 h1.52 r270
  text "15-22V" at 67.691,79.883 h1.52 r270
  text "0.05-32A" at 66.421,79.375 h1.52 r270
  text "C" at 98.806,76.327 h1.52 r270
  text "CAUTION HOT!" at 60.325,73.914 h1.8 r270
  text "Xtern Ripper Lite" at 73.279,73.152 h2.2 r270
  text "SYSHB" at 95.25,73.025 h1.52
  text "+" at 75.057,71.374 h1.8 r270
  text "+" at 82.423,70.358 h1.8 r270
  text "Designed by:" at 97.536,70.358 h1.8
  text "Redstoner_35" at 97.028,68.58 h2
  text "-" at 84.201,65.786 h2
  text "BATT" at 71.247,65.659 h1.52
  text "MUST" at 71.501,64.389 h1.52
  text "V1.3" at 93.599,64.262 h1.8
  text ">70A" at 71.374,62.992 h1.52
  text "250312" at 84.824,60.821 h1.52 r270
Top Solder:
  circle w1.5: c80,80 r23
  rectangle: 64.017,88.138 67.331,88.708
  rectangle: 69.866,88.138 73.181,88.708
  rectangle: 85.481,88.139 88.795,88.709
  rectangle: 91.313,88.138 94.628,88.709
  rectangle: 67.723,95.123 69.723,97.123
  rectangle: 77.597,75.438 82.804,78.232
  rectangle: 96.679,88.265 98.679,90.265
  rectangle: 61.5,89.027 63.5,91.027
  region: 83.946,88.138 83.946,91.138 75.946,91.138 75.946,88.138
  lines w1: 72.644,70.231 75.565,70.231 ; 75.692,70.104 84.455,70.104 87.376,70.104 ; 77.47,70.104 77.47,78.74 ; 82.55,70.231 82.55,78.74
  lines w2: 63.881,71.628 63.881,71.12 63.881,70.866 64.389,70.358 66.167,70.358 ; 94.234,70.231 96.012,70.231 96.774,70.993 96.774,71.501 96.647,71.628
Bottom Solder:
  circle w2.5: c80,80 r22.4
  region: 74.041,88.519 74.041,92.519 64.041,92.519 64.041,88.519
  rectangle: 64.643,66.461 67.143,68.961
  rectangle: 62.484,75.311 65.532,76.454
  region: 96.106,88.519 96.106,92.519 86.106,92.519 86.106,88.519

## Text inside footprints (layer, text, board x,y; h text height)
C1: Top Overlay "+" at 85.598,71.374 h1.27 r90
C2: Top Overlay "+" at 74.422,71.501 h1.27 r270
C3: Top Overlay "+" at 77.47,92.202 h1.27
C4: Top Overlay "+" at 75.184,95.25 h1.27 r90